# EAGLE board OLED_Block-GiantPanel-v10 (EAGLE 6.6.0), part 1 of 7
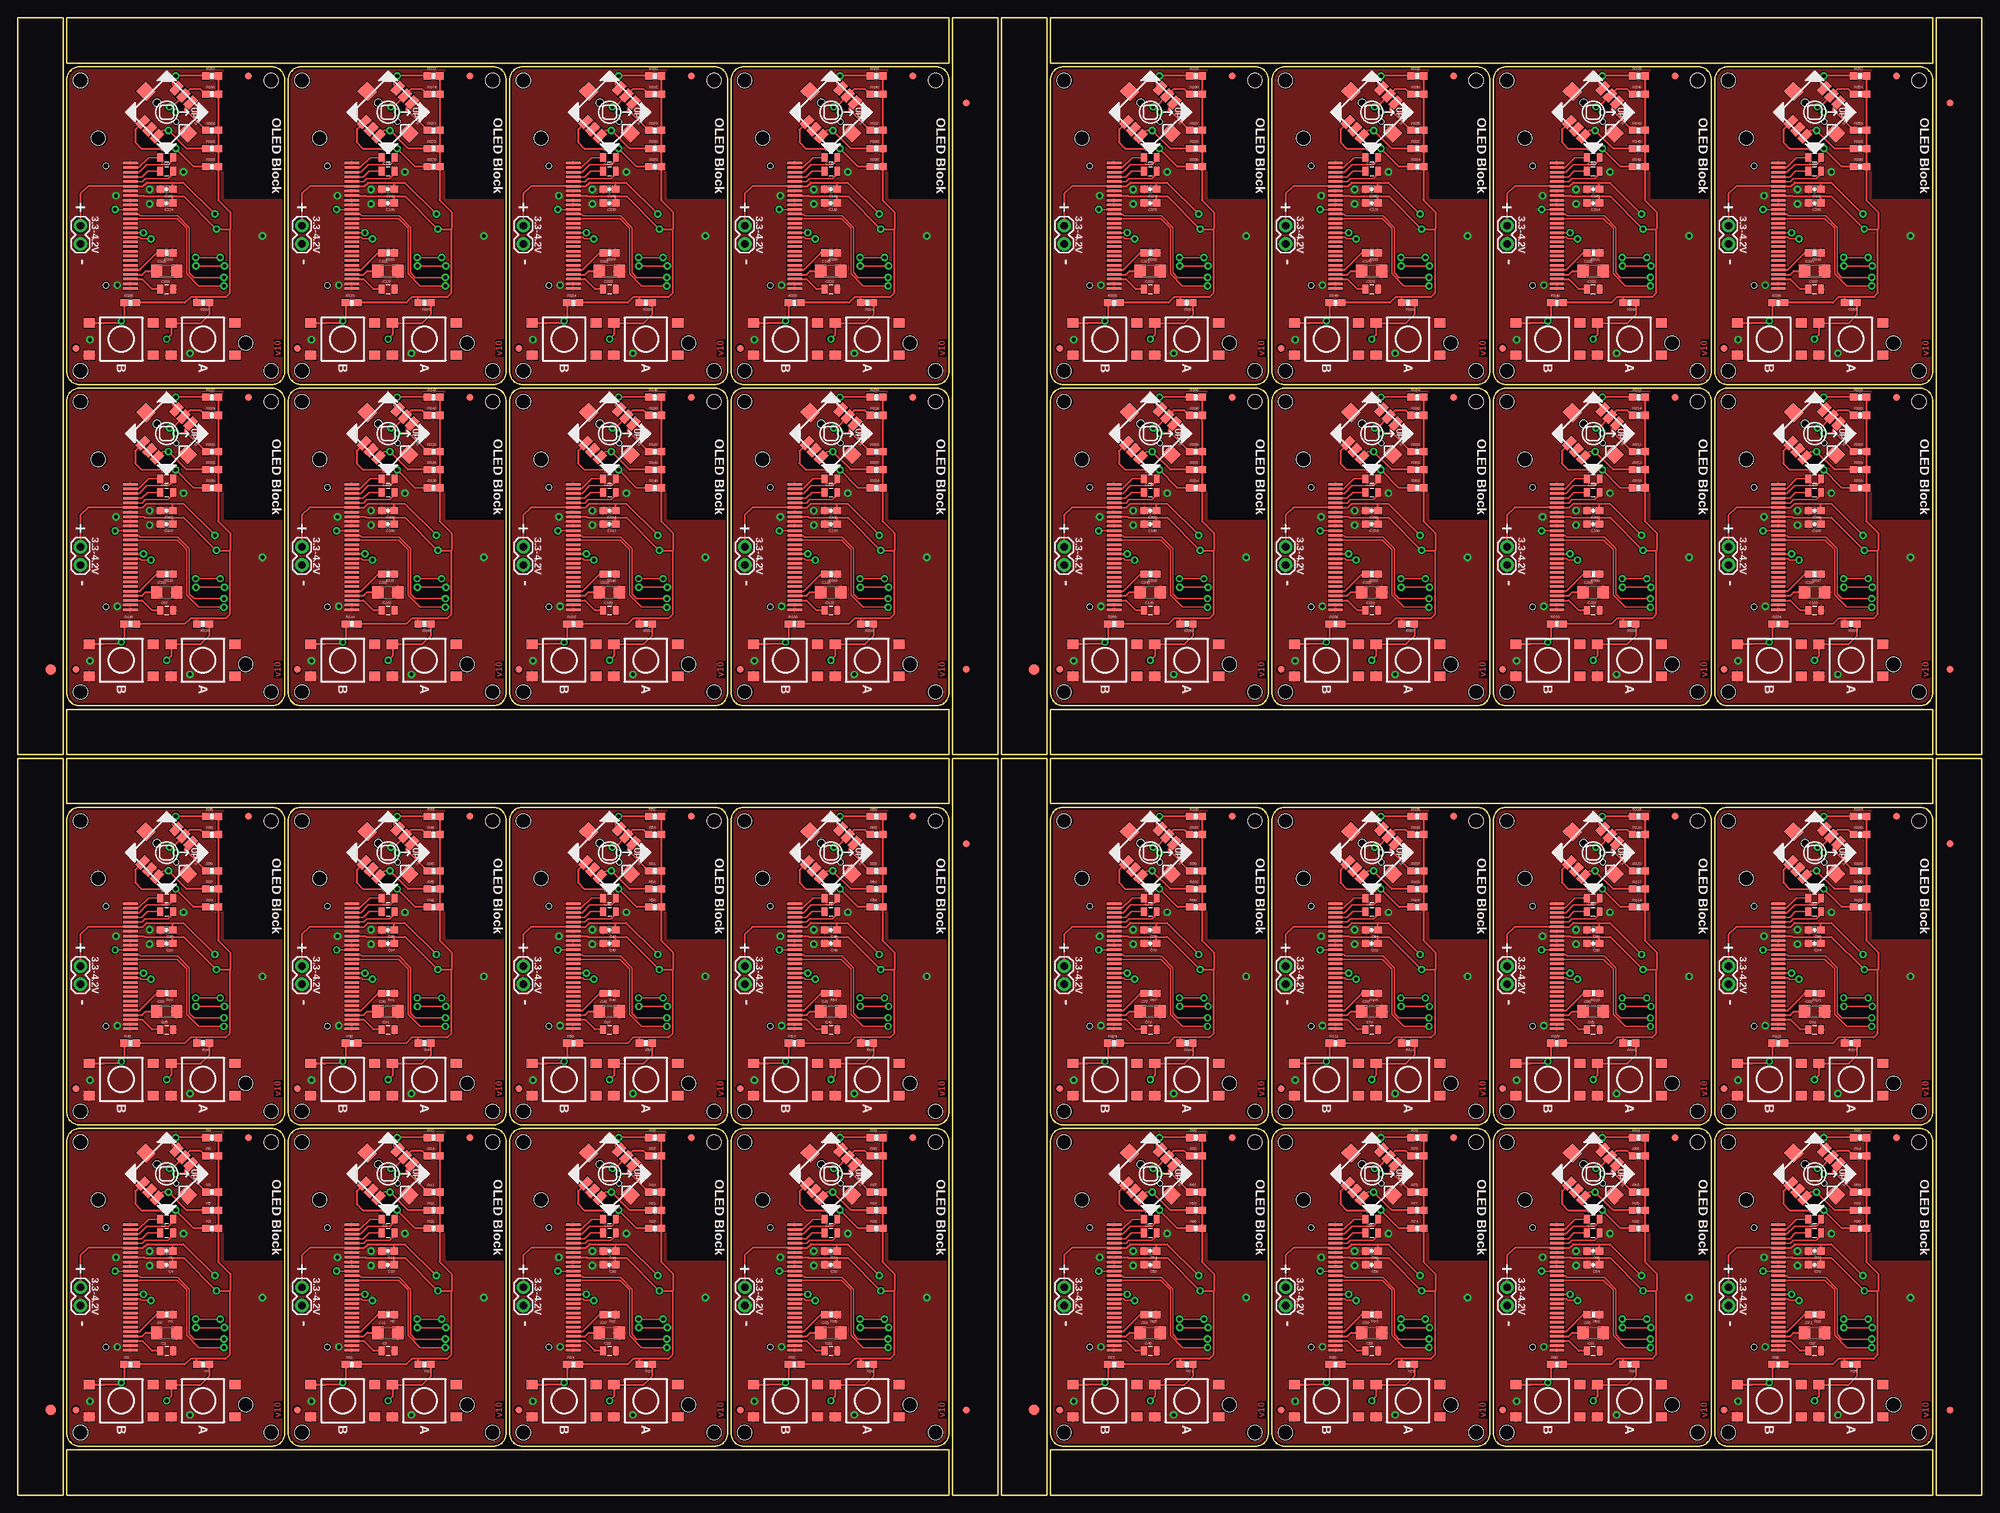
[diagram p0: board, top side]
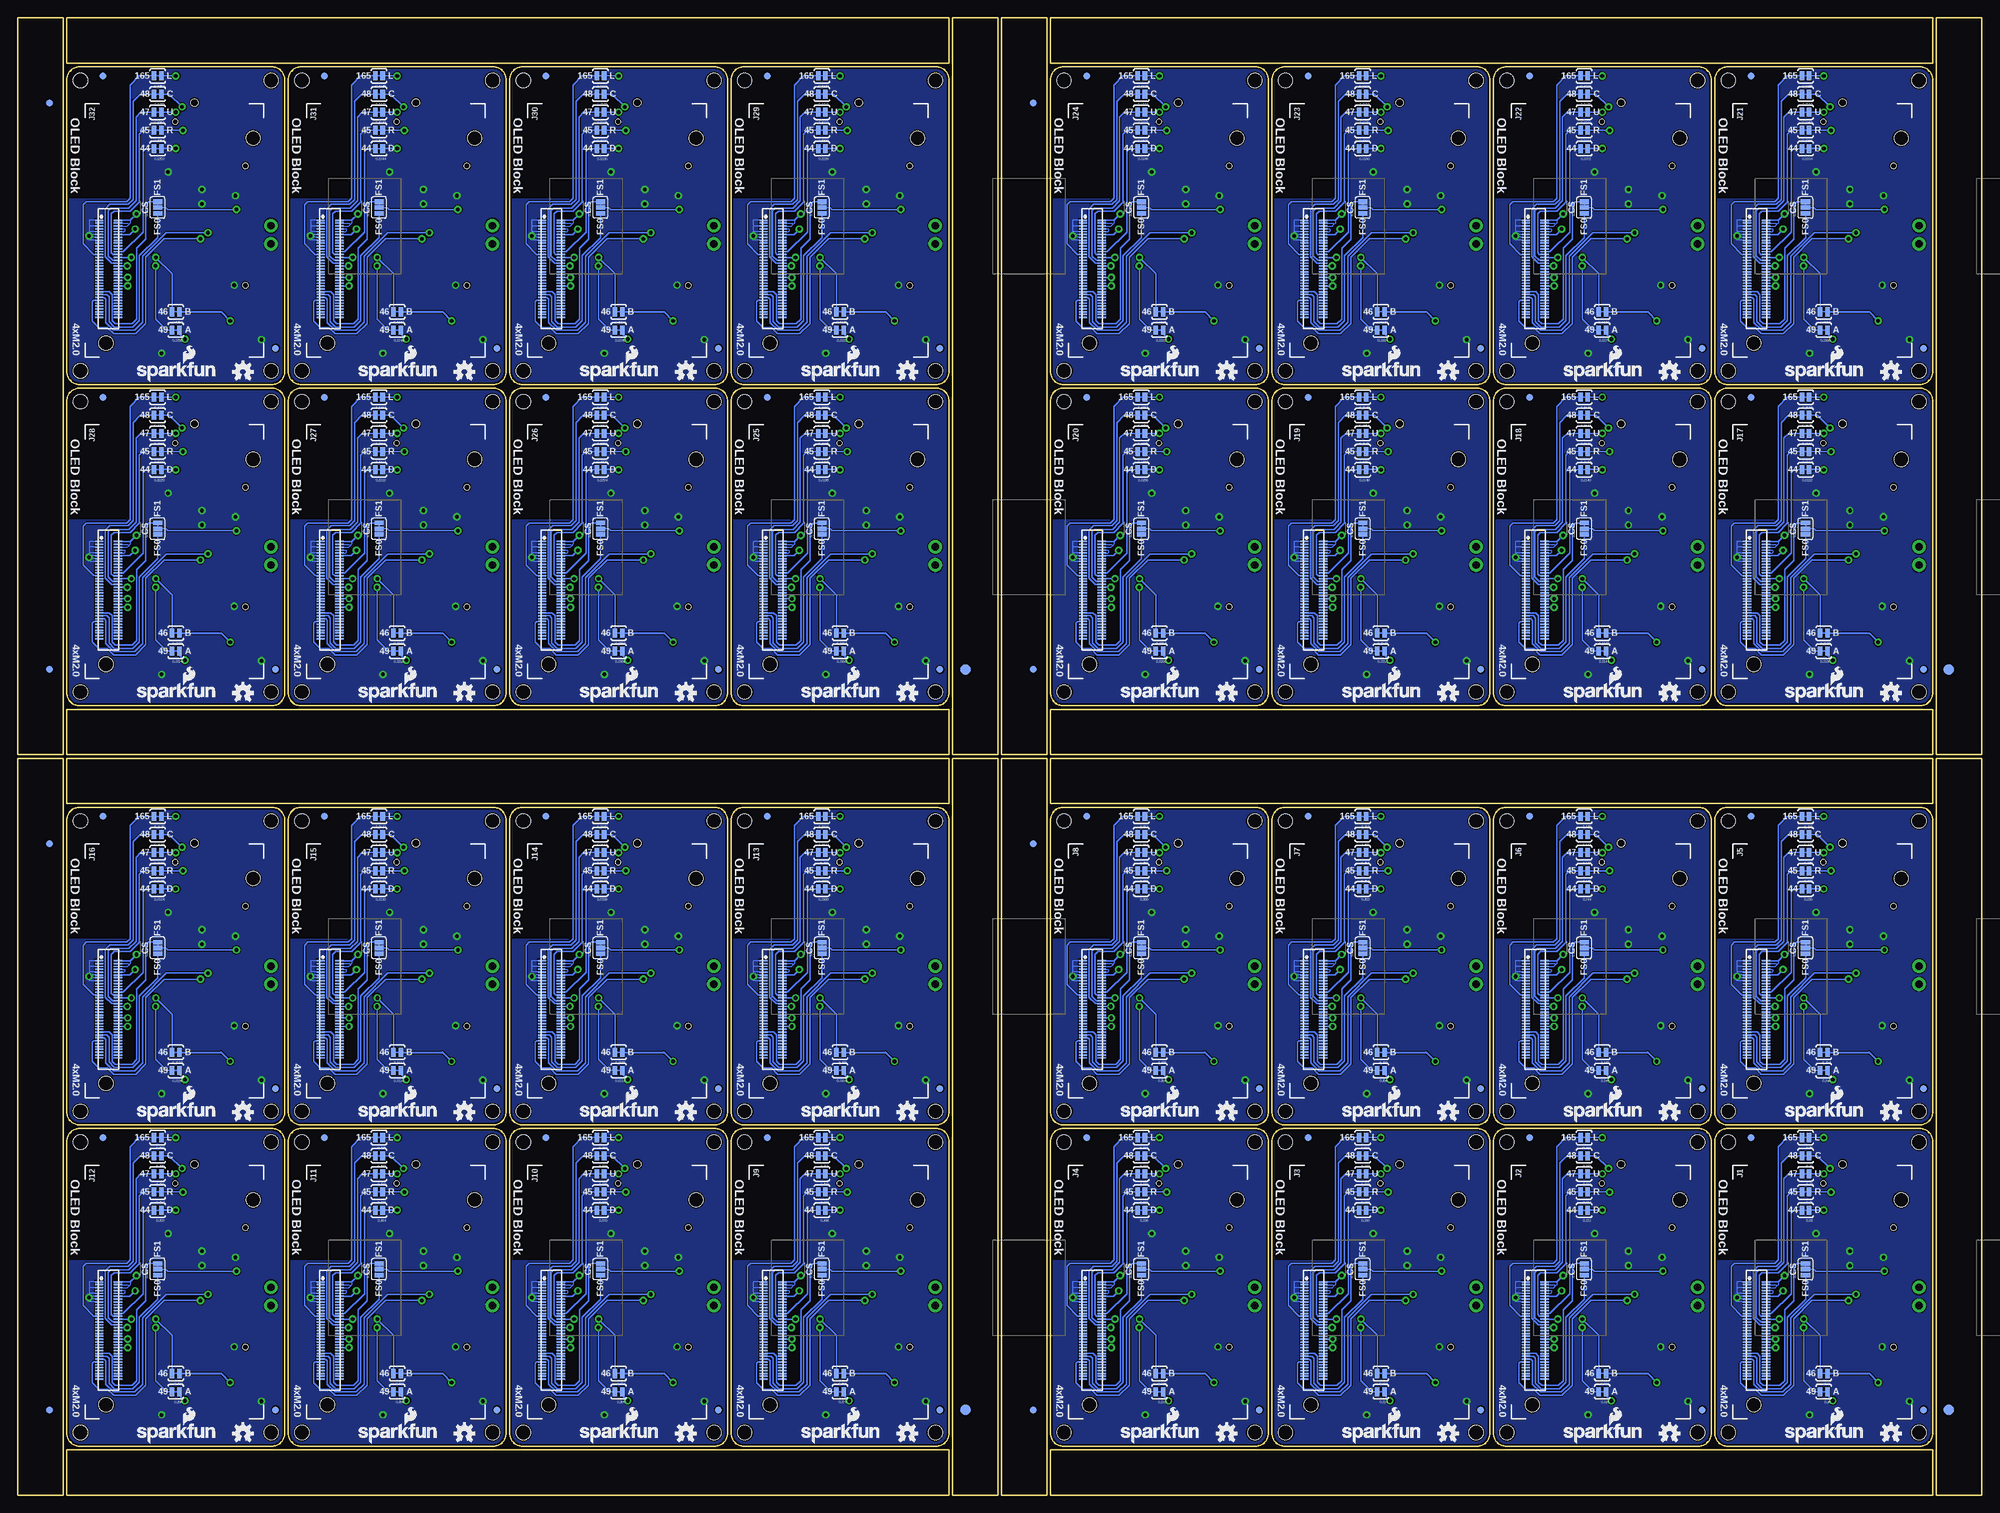
[diagram p1: board, bottom side, seen from below]

Size 274.83 x 206.76 mm. Coordinates in mm from the lower left corner, seen from the top.
Outline: 336 segments
Copper layers (1*16): Top 0.035mm / dielectric 1.5mm / Bottom 0.035mm
Design rules "SparkFun-2-layer *": minimum track width 6mil, minimum drill 13mil, track to track 6mil, track to pad 6mil, pad to pad 6mil, via to via 6mil, smd to smd 6mil, copper to edge 8mil, drill to drill 8mil, minimum pad ring 12mil, minimum via ring 10mil, stop-mask expansion 4mil, vias tented up to drill 20mil, thermal gap 6mil
Holes 2 mm at 35.43,8.76 8.76,8.76 8.76,49.4 35.43,49.4 66.42,8.76 39.75,8.76 39.75,49.4 66.42,49.4 97.41,8.76 70.74,8.76 70.74,49.4 97.41,49.4 128.4,8.76 101.73,8.76 101.73,49.4 128.4,49.4 35.43,53.72 8.76,53.72 8.76,94.36 35.43,94.36 66.42,53.72 39.75,53.72 39.75,94.36 66.42,94.36 97.41,53.72 70.74,53.72 70.74,94.36 97.41,94.36 128.4,53.72 101.73,53.72 101.73,94.36 128.4,94.36 173.1,8.76 146.43,8.76 146.43,49.4 173.1,49.4 204.09,8.76 177.42,8.76 177.42,49.4 204.09,49.4 235.08,8.76 208.41,8.76 208.41,49.4 235.08,49.4 266.06,8.76 239.4,8.76 239.4,49.4 266.06,49.4 173.1,53.72 146.43,53.72 146.43,94.36 173.1,94.36 204.09,53.72 177.42,53.72 177.42,94.36 204.09,94.36 235.08,53.72 208.41,53.72 208.41,94.36 235.08,94.36 266.06,53.72 239.4,53.72 239.4,94.36 266.06,94.36 35.43,112.39 8.76,112.39 8.76,153.03 35.43,153.03 66.42,112.39 39.75,112.39 39.75,153.03 66.42,153.03 97.41,112.39 70.74,112.39 70.74,153.03 97.41,153.03 128.4,112.39 101.73,112.39 101.73,153.03 128.4,153.03 35.43,157.35 8.76,157.35 8.76,197.99 35.43,197.99 66.42,157.35 39.75,157.35 39.75,197.99 66.42,197.99 97.41,157.35 70.74,157.35 70.74,197.99 97.41,197.99 128.4,157.35 101.73,157.35 101.73,197.99 128.4,197.99 173.1,112.39 146.43,112.39 146.43,153.03 173.1,153.03 204.09,112.39 177.42,112.39 177.42,153.03 204.09,153.03 235.08,112.39 208.41,112.39 208.41,153.03 235.08,153.03 266.06,112.39 239.4,112.39 239.4,153.03 266.06,153.03 173.1,157.35 146.43,157.35 146.43,197.99 173.1,197.99 204.09,157.35 177.42,157.35 177.42,197.99 204.09,197.99 235.08,157.35 208.41,157.35 208.41,197.99 235.08,197.99 266.06,157.35 239.4,157.35 239.4,197.99 266.06,197.99
tRestrict: area 29,33 to 37.3,51.3; area 59.9,33 to 68.3,51.3; area 90.9,33 to 99.3,51.3; area 121.9,33 to 130.3,51.3; area 29,78 to 37.3,96.3; area 59.9,78 to 68.3,96.3; area 90.9,78 to 99.3,96.3; area 121.9,78 to 130.3,96.3; area 166.6,33 to 175,51.3; area 197.6,33 to 206,51.3; area 228.6,33 to 237,51.3; area 259.6,33 to 268,51.3; 20 more areas
bRestrict: area 29,33 to 37.3,51.3; area 59.9,33 to 68.3,51.3; area 90.9,33 to 99.3,51.3; area 121.9,33 to 130.3,51.3; area 29,78 to 37.3,96.3; area 59.9,78 to 68.3,96.3; area 90.9,78 to 99.3,96.3; area 121.9,78 to 130.3,96.3; area 166.6,33 to 175,51.3; area 197.6,33 to 206,51.3; area 228.6,33 to 237,51.3; area 259.6,33 to 268,51.3; 20 more areas

## Footprints (pad centres in the part's own frame; a part is rotated, then mirrored left to right if it is on the bottom)
0805 = smd 0.8 x 1.2: 1 -0.9,0; 2 0.9,0
0603-CAP = smd 1.1 x 1: 1 -0.85,0; 2 0.85,0
1206 = smd 1.6 x 1.8: 1 -1.4,0; 2 1.4,0
FIDUCIAL-1.5X3 = smd 1.5 x 1.5: 1 0,0
FIDUCIAL-1X2 = smd 1 x 1: 1 0,0
EDISON_DAUGHTER = smd 1.14 x 0.2: 1 1.98,19.17; 2 4.62,19.17; 3 1.98,18.77; 4 4.62,18.77; 5 1.98,18.37; 6 4.62,18.37; 7 1.98,17.97; 8 4.62,17.97; 9 1.98,17.57; 10 4.62,17.57; 11 1.98,17.17; 12 4.62,17.17; 13 1.98,16.77; 14 4.62,16.77; 15 1.98,16.37; 16 4.62,16.37; 17 1.98,15.97; 18 4.62,15.97; 19 1.98,15.57; 20 4.62,15.57; 21 1.98,15.17; 22 4.62,15.17; 23 1.98,14.77; 24 4.62,14.77; 25 1.98,14.37; 26 4.62,14.37; 27 1.98,13.97; 28 4.62,13.97; 29 1.98,13.57; 30 4.62,13.57; 31 1.98,13.17; 32 4.62,13.17; 33 1.98,12.77; 34 4.62,12.77; 35 1.98,12.37; 36 4.62,12.37; 37 1.98,11.97; 38 4.62,11.97; 39 1.98,11.57; 40 4.62,11.57; 41 1.98,11.17; 42 4.62,11.17; 43 1.98,10.77; 44 4.62,10.77; 45 1.98,10.37; 46 4.62,10.37; 47 1.98,9.97; 48 4.62,9.97; 49 1.98,9.57; 50 4.62,9.57; 51 1.98,9.17; 52 4.62,9.17; 53 1.98,8.77; 54 4.62,8.77; 55 1.98,8.37; 56 4.62,8.37; 57 1.98,7.97; 58 4.62,7.97; 59 1.98,7.57; 60 4.62,7.57; 61 1.98,7.17; 62 4.62,7.17; 63 1.98,6.77; 64 4.62,6.77; 65 1.98,6.37; 66 4.62,6.37; 67 1.98,5.97; 68 4.62,5.97; 69 1.98,5.57; 70 4.62,5.57 | hole 2: 23.53,30.67; 2.93,1.98
1X02 = drill 1.016 pad 1.88: 1 0,0; 2 2.54,0
OLED-0.66-64X48 = smd 0.35 x 2: 1 0,0; 2 0.65,0; 3 1.3,0; 4 1.95,0; 5 2.6,0; 6 3.25,0; 7 3.9,0; 8 4.55,0; 9 5.2,0; 10 5.85,0; 11 6.5,0; 12 7.15,0; 13 7.8,0; 14 8.45,0; 15 9.1,0; 16 9.75,0; 17 10.4,0; 18 11.05,0; 19 11.7,0; 20 12.35,0; 21 13,0; 22 13.65,0; 23 14.3,0; 24 14.95,0; 25 15.6,0; 26 16.25,0; 27 16.9,0; 28 17.55,0 | hole 0.8: 17.15,-3.4; 0.4,-3.4
0603-RES = smd 1.1 x 1: 1 -0.85,0; 2 0.85,0
TACTILE_SWITCH_TALL = smd 1.55 x 1.3: A1 -4.475,-2.25; A2 4.475,-2.25; B1 -4.475,2.25; B2 4.475,2.25
JOYSTICK_MINI = smd 1.85 x 1.1: A -3.325,1.4; B 3.325,1.4; C -3.325,-1.4; CTR -3.325,0; D 3.325,-1.4; GND 3.325,0 | smd 1.9 x 2: NC 0,4.13; NC@0 0,-4.13 | hole 0.75: 0,1.9 | hole 1.05: 0,-1.9
PAD-JUMPER-2-NC_BY_TRACE_YES_SILK = smd 0.635 x 1.27: 1 -0.508,0; 2 0.508,0
PAD-JUMPER-3-2OF3_NC_BY_TRACE_YES_SILK_FULL_BOX = smd 0.635 x 1.27: 1 -0.813,0; 2 0,0; 3 0.813,0

## Placement (x,y rotation side)
C1  2.2uF  [0805]  20.83,20.19 0 top
C2  1uF X5R  [0805]  20.83,36.7 0 top
C3  1uF X5R  [0805]  20.83,38.61 0 top
C4  1uF  [0603-CAP]  20.83,32.26 180 top
C5  4.7uF/16V  [1206]  20.83,22.73 0 top
C6  1uF  [0603-CAP]  20.83,34.16 180 top
C7  2.2uF  [0805]  51.82,20.19 0 top
C8  1uF X5R  [0805]  51.82,36.7 0 top
C9  1uF X5R  [0805]  51.82,38.61 0 top
C10  1uF  [0603-CAP]  51.82,32.26 180 top
C11  4.7uF/16V  [1206]  51.82,22.73 0 top
C12  1uF  [0603-CAP]  51.82,34.16 180 top
C13  2.2uF  [0805]  82.8,20.19 0 top
C14  1uF X5R  [0805]  82.8,36.7 0 top
C15  1uF X5R  [0805]  82.8,38.61 0 top
C16  1uF  [0603-CAP]  82.8,32.26 180 top
C17  4.7uF/16V  [1206]  82.8,22.73 0 top
C18  1uF  [0603-CAP]  82.8,34.16 180 top
C19  2.2uF  [0805]  113.79,20.19 0 top
C20  1uF X5R  [0805]  113.79,36.7 0 top
C21  1uF X5R  [0805]  113.79,38.61 0 top
C22  1uF  [0603-CAP]  113.79,32.26 180 top
C23  4.7uF/16V  [1206]  113.79,22.73 0 top
C24  1uF  [0603-CAP]  113.79,34.16 180 top
C25  2.2uF  [0805]  20.83,65.15 0 top
C26  1uF X5R  [0805]  20.83,81.66 0 top
C27  1uF X5R  [0805]  20.83,83.57 0 top
C28  1uF  [0603-CAP]  20.83,77.22 180 top
C29  4.7uF/16V  [1206]  20.83,67.69 0 top
C30  1uF  [0603-CAP]  20.83,79.12 180 top
C31  2.2uF  [0805]  51.82,65.15 0 top
C32  1uF X5R  [0805]  51.82,81.66 0 top
C33  1uF X5R  [0805]  51.82,83.57 0 top
C34  1uF  [0603-CAP]  51.82,77.22 180 top
C35  4.7uF/16V  [1206]  51.82,67.69 0 top
C36  1uF  [0603-CAP]  51.82,79.12 180 top
C37  2.2uF  [0805]  82.8,65.15 0 top
C38  1uF X5R  [0805]  82.8,81.66 0 top
C39  1uF X5R  [0805]  82.8,83.57 0 top
C40  1uF  [0603-CAP]  82.8,77.22 180 top
C41  4.7uF/16V  [1206]  82.8,67.69 0 top
C42  1uF  [0603-CAP]  82.8,79.12 180 top
C43  2.2uF  [0805]  113.79,65.15 0 top
C44  1uF X5R  [0805]  113.79,81.66 0 top
C45  1uF X5R  [0805]  113.79,83.57 0 top
C46  1uF  [0603-CAP]  113.79,77.22 180 top
C47  4.7uF/16V  [1206]  113.79,67.69 0 top
C48  1uF  [0603-CAP]  113.79,79.12 180 top
C49  2.2uF  [0805]  158.5,20.19 0 top
C50  1uF X5R  [0805]  158.5,36.7 0 top
C51  1uF X5R  [0805]  158.5,38.61 0 top
C52  1uF  [0603-CAP]  158.5,32.26 180 top
C53  4.7uF/16V  [1206]  158.5,22.73 0 top
C54  1uF  [0603-CAP]  158.5,34.16 180 top
C55  2.2uF  [0805]  189.48,20.19 0 top
C56  1uF X5R  [0805]  189.48,36.7 0 top
C57  1uF X5R  [0805]  189.48,38.61 0 top
C58  1uF  [0603-CAP]  189.48,32.26 180 top
C59  4.7uF/16V  [1206]  189.48,22.73 0 top
C60  1uF  [0603-CAP]  189.48,34.16 180 top
C61  2.2uF  [0805]  220.47,20.19 0 top
C62  1uF X5R  [0805]  220.47,36.7 0 top
C63  1uF X5R  [0805]  220.47,38.61 0 top
C64  1uF  [0603-CAP]  220.47,32.26 180 top
C65  4.7uF/16V  [1206]  220.47,22.73 0 top
C66  1uF  [0603-CAP]  220.47,34.16 180 top
C67  2.2uF  [0805]  251.46,20.19 0 top
C68  1uF X5R  [0805]  251.46,36.7 0 top
C69  1uF X5R  [0805]  251.46,38.61 0 top
C70  1uF  [0603-CAP]  251.46,32.26 180 top
C71  4.7uF/16V  [1206]  251.46,22.73 0 top
C72  1uF  [0603-CAP]  251.46,34.16 180 top
C73  2.2uF  [0805]  158.5,65.15 0 top
C74  1uF X5R  [0805]  158.5,81.66 0 top
C75  1uF X5R  [0805]  158.5,83.57 0 top
C76  1uF  [0603-CAP]  158.5,77.22 180 top
C77  4.7uF/16V  [1206]  158.5,67.69 0 top
C78  1uF  [0603-CAP]  158.5,79.12 180 top
C79  2.2uF  [0805]  189.48,65.15 0 top
C80  1uF X5R  [0805]  189.48,81.66 0 top
C81  1uF X5R  [0805]  189.48,83.57 0 top
C82  1uF  [0603-CAP]  189.48,77.22 180 top
C83  4.7uF/16V  [1206]  189.48,67.69 0 top
C84  1uF  [0603-CAP]  189.48,79.12 180 top
C85  2.2uF  [0805]  220.47,65.15 0 top
C86  1uF X5R  [0805]  220.47,81.66 0 top
C87  1uF X5R  [0805]  220.47,83.57 0 top
C88  1uF  [0603-CAP]  220.47,77.22 180 top
C89  4.7uF/16V  [1206]  220.47,67.69 0 top
C90  1uF  [0603-CAP]  220.47,79.12 180 top
C91  2.2uF  [0805]  251.46,65.15 0 top
C92  1uF X5R  [0805]  251.46,81.66 0 top
C93  1uF X5R  [0805]  251.46,83.57 0 top
C94  1uF  [0603-CAP]  251.46,77.22 180 top
C95  4.7uF/16V  [1206]  251.46,67.69 0 top
C96  1uF  [0603-CAP]  251.46,79.12 180 top
C97  2.2uF  [0805]  20.83,123.83 0 top
C98  1uF X5R  [0805]  20.83,140.34 0 top
C99  1uF X5R  [0805]  20.83,142.24 0 top
C100  1uF  [0603-CAP]  20.83,135.89 180 top
C101  4.7uF/16V  [1206]  20.83,126.36 0 top
C102  1uF  [0603-CAP]  20.83,137.79 180 top
C103  2.2uF  [0805]  51.82,123.83 0 top
C104  1uF X5R  [0805]  51.82,140.34 0 top
C105  1uF X5R  [0805]  51.82,142.24 0 top
C106  1uF  [0603-CAP]  51.82,135.89 180 top
C107  4.7uF/16V  [1206]  51.82,126.36 0 top
C108  1uF  [0603-CAP]  51.82,137.79 180 top
C109  2.2uF  [0805]  82.8,123.83 0 top
C110  1uF X5R  [0805]  82.8,140.34 0 top
C111  1uF X5R  [0805]  82.8,142.24 0 top
C112  1uF  [0603-CAP]  82.8,135.89 180 top
C113  4.7uF/16V  [1206]  82.8,126.36 0 top
C114  1uF  [0603-CAP]  82.8,137.79 180 top
C115  2.2uF  [0805]  113.79,123.83 0 top
C116  1uF X5R  [0805]  113.79,140.34 0 top
C117  1uF X5R  [0805]  113.79,142.24 0 top
C118  1uF  [0603-CAP]  113.79,135.89 180 top
C119  4.7uF/16V  [1206]  113.79,126.36 0 top
C120  1uF  [0603-CAP]  113.79,137.79 180 top
C121  2.2uF  [0805]  20.83,168.78 0 top
C122  1uF X5R  [0805]  20.83,185.29 0 top
C123  1uF X5R  [0805]  20.83,187.2 0 top
C124  1uF  [0603-CAP]  20.83,180.85 180 top
C125  4.7uF/16V  [1206]  20.83,171.32 0 top
C126  1uF  [0603-CAP]  20.83,182.75 180 top
C127  2.2uF  [0805]  51.82,168.78 0 top
C128  1uF X5R  [0805]  51.82,185.29 0 top
C129  1uF X5R  [0805]  51.82,187.2 0 top
C130  1uF  [0603-CAP]  51.82,180.85 180 top
C131  4.7uF/16V  [1206]  51.82,171.32 0 top
C132  1uF  [0603-CAP]  51.82,182.75 180 top
C133  2.2uF  [0805]  82.8,168.78 0 top
C134  1uF X5R  [0805]  82.8,185.29 0 top
C135  1uF X5R  [0805]  82.8,187.2 0 top
C136  1uF  [0603-CAP]  82.8,180.85 180 top
C137  4.7uF/16V  [1206]  82.8,171.32 0 top
C138  1uF  [0603-CAP]  82.8,182.75 180 top
C139  2.2uF  [0805]  113.79,168.78 0 top
C140  1uF X5R  [0805]  113.79,185.29 0 top
C141  1uF X5R  [0805]  113.79,187.2 0 top
C142  1uF  [0603-CAP]  113.79,180.85 180 top
C143  4.7uF/16V  [1206]  113.79,171.32 0 top
C144  1uF  [0603-CAP]  113.79,182.75 180 top
C145  2.2uF  [0805]  158.5,123.83 0 top
C146  1uF X5R  [0805]  158.5,140.34 0 top
C147  1uF X5R  [0805]  158.5,142.24 0 top
C148  1uF  [0603-CAP]  158.5,135.89 180 top
C149  4.7uF/16V  [1206]  158.5,126.36 0 top
C150  1uF  [0603-CAP]  158.5,137.79 180 top
C151  2.2uF  [0805]  189.48,123.83 0 top
C152  1uF X5R  [0805]  189.48,140.34 0 top
C153  1uF X5R  [0805]  189.48,142.24 0 top
C154  1uF  [0603-CAP]  189.48,135.89 180 top
C155  4.7uF/16V  [1206]  189.48,126.36 0 top
C156  1uF  [0603-CAP]  189.48,137.79 180 top
C157  2.2uF  [0805]  220.47,123.83 0 top
C158  1uF X5R  [0805]  220.47,140.34 0 top
C159  1uF X5R  [0805]  220.47,142.24 0 top
C160  1uF  [0603-CAP]  220.47,135.89 180 top
C161  4.7uF/16V  [1206]  220.47,126.36 0 top
C162  1uF  [0603-CAP]  220.47,137.79 180 top
C163  2.2uF  [0805]  251.46,123.83 0 top
C164  1uF X5R  [0805]  251.46,140.34 0 top
C165  1uF X5R  [0805]  251.46,142.24 0 top
C166  1uF  [0603-CAP]  251.46,135.89 180 top
C167  4.7uF/16V  [1206]  251.46,126.36 0 top
C168  1uF  [0603-CAP]  251.46,137.79 180 top
C169  2.2uF  [0805]  158.5,168.78 0 top
C170  1uF X5R  [0805]  158.5,185.29 0 top
C171  1uF X5R  [0805]  158.5,187.2 0 top
C172  1uF  [0603-CAP]  158.5,180.85 180 top
C173  4.7uF/16V  [1206]  158.5,171.32 0 top
C174  1uF  [0603-CAP]  158.5,182.75 180 top
C175  2.2uF  [0805]  189.48,168.78 0 top
C176  1uF X5R  [0805]  189.48,185.29 0 top
C177  1uF X5R  [0805]  189.48,187.2 0 top
C178  1uF  [0603-CAP]  189.48,180.85 180 top
C179  4.7uF/16V  [1206]  189.48,171.32 0 top
C180  1uF  [0603-CAP]  189.48,182.75 180 top
C181  2.2uF  [0805]  220.47,168.78 0 top
C182  1uF X5R  [0805]  220.47,185.29 0 top
C183  1uF X5R  [0805]  220.47,187.2 0 top
C184  1uF  [0603-CAP]  220.47,180.85 180 top
C185  4.7uF/16V  [1206]  220.47,171.32 0 top
C186  1uF  [0603-CAP]  220.47,182.75 180 top
C187  2.2uF  [0805]  251.46,168.78 0 top
C188  1uF X5R  [0805]  251.46,185.29 0 top
C189  1uF X5R  [0805]  251.46,187.2 0 top
C190  1uF  [0603-CAP]  251.46,180.85 180 top
C191  4.7uF/16V  [1206]  251.46,171.32 0 top
C192  1uF  [0603-CAP]  251.46,182.75 180 top
E$1  [FIDUCIAL-1.5X3]  4.57,11.94 0 top
E$2  [FIDUCIAL-1.5X3]  4.57,11.94 0 bottom
E$3  [FIDUCIAL-1X2]  132.72,11.94 0 bottom
E$4  [FIDUCIAL-1X2]  132.72,11.94 0 top
E$5  [FIDUCIAL-1X2]  132.72,91.19 180 top
E$6  [FIDUCIAL-1X2]  132.72,91.19 180 bottom
E$7  [FIDUCIAL-1X2]  270.38,11.94 0 top
E$8  [FIDUCIAL-1X2]  270.38,91.19 180 top
E$9  [FIDUCIAL-1.5X3]  142.24,11.94 0 top
E$10  [FIDUCIAL-1.5X3]  142.24,11.94 0 bottom
E$11  [FIDUCIAL-1X2]  270.38,11.94 0 bottom
E$12  [FIDUCIAL-1X2]  270.38,91.19 180 bottom
E$13  [FIDUCIAL-1X2]  132.72,115.57 0 top
E$14  [FIDUCIAL-1X2]  132.72,194.82 180 top
E$15  [FIDUCIAL-1.5X3]  4.57,115.57 0 top
E$16  [FIDUCIAL-1.5X3]  4.57,115.57 0 bottom
E$17  [FIDUCIAL-1X2]  132.72,115.57 0 bottom
E$18  [FIDUCIAL-1X2]  132.72,194.82 180 bottom
E$19  [FIDUCIAL-1X2]  270.38,115.57 0 top
E$20  [FIDUCIAL-1X2]  270.38,194.82 180 top
E$21  [FIDUCIAL-1.5X3]  142.24,115.57 0 top
E$22  [FIDUCIAL-1.5X3]  142.24,115.57 0 bottom
E$23  [FIDUCIAL-1X2]  270.38,115.57 0 bottom
E$24  [FIDUCIAL-1X2]  270.38,194.82 180 bottom
FID1  FIDUCIAL1X2  [FIDUCIAL-1X2]  32.26,50.04 0 bottom
FID2  FIDUCIAL1X2  [FIDUCIAL-1X2]  8.13,11.94 0 top
FID3  FIDUCIAL1X2  [FIDUCIAL-1X2]  8.13,11.94 0 bottom
FID4  FIDUCIAL1X2  [FIDUCIAL-1X2]  32.26,50.04 0 top
FID5  FIDUCIAL1X2  [FIDUCIAL-1X2]  63.25,50.04 0 bottom
FID6  FIDUCIAL1X2  [FIDUCIAL-1X2]  39.12,11.94 0 top
FID7  FIDUCIAL1X2  [FIDUCIAL-1X2]  39.12,11.94 0 bottom
FID8  FIDUCIAL1X2  [FIDUCIAL-1X2]  63.25,50.04 0 top
FID9  FIDUCIAL1X2  [FIDUCIAL-1X2]  94.23,50.04 0 bottom
FID10  FIDUCIAL1X2  [FIDUCIAL-1X2]  70.1,11.94 0 top
FID11  FIDUCIAL1X2  [FIDUCIAL-1X2]  70.1,11.94 0 bottom
FID12  FIDUCIAL1X2  [FIDUCIAL-1X2]  94.23,50.04 0 top
FID13  FIDUCIAL1X2  [FIDUCIAL-1X2]  125.22,50.04 0 bottom
FID14  FIDUCIAL1X2  [FIDUCIAL-1X2]  101.09,11.94 0 top
FID15  FIDUCIAL1X2  [FIDUCIAL-1X2]  101.09,11.94 0 bottom
FID16  FIDUCIAL1X2  [FIDUCIAL-1X2]  125.22,50.04 0 top
FID17  FIDUCIAL1X2  [FIDUCIAL-1X2]  32.26,95 0 bottom
FID18  FIDUCIAL1X2  [FIDUCIAL-1X2]  8.13,56.9 0 top
FID19  FIDUCIAL1X2  [FIDUCIAL-1X2]  8.13,56.9 0 bottom
FID20  FIDUCIAL1X2  [FIDUCIAL-1X2]  32.26,95 0 top
FID21  FIDUCIAL1X2  [FIDUCIAL-1X2]  63.25,95 0 bottom
FID22  FIDUCIAL1X2  [FIDUCIAL-1X2]  39.12,56.9 0 top
FID23  FIDUCIAL1X2  [FIDUCIAL-1X2]  39.12,56.9 0 bottom
FID24  FIDUCIAL1X2  [FIDUCIAL-1X2]  63.25,95 0 top
FID25  FIDUCIAL1X2  [FIDUCIAL-1X2]  94.23,95 0 bottom
FID26  FIDUCIAL1X2  [FIDUCIAL-1X2]  70.1,56.9 0 top
FID27  FIDUCIAL1X2  [FIDUCIAL-1X2]  70.1,56.9 0 bottom
FID28  FIDUCIAL1X2  [FIDUCIAL-1X2]  94.23,95 0 top
FID29  FIDUCIAL1X2  [FIDUCIAL-1X2]  125.22,95 0 bottom
FID30  FIDUCIAL1X2  [FIDUCIAL-1X2]  101.09,56.9 0 top
FID31  FIDUCIAL1X2  [FIDUCIAL-1X2]  101.09,56.9 0 bottom
FID32  FIDUCIAL1X2  [FIDUCIAL-1X2]  125.22,95 0 top
FID33  FIDUCIAL1X2  [FIDUCIAL-1X2]  169.93,50.04 0 bottom
FID34  FIDUCIAL1X2  [FIDUCIAL-1X2]  145.8,11.94 0 top
FID35  FIDUCIAL1X2  [FIDUCIAL-1X2]  145.8,11.94 0 bottom
FID36  FIDUCIAL1X2  [FIDUCIAL-1X2]  169.93,50.04 0 top
FID37  FIDUCIAL1X2  [FIDUCIAL-1X2]  200.91,50.04 0 bottom
FID38  FIDUCIAL1X2  [FIDUCIAL-1X2]  176.78,11.94 0 top
FID39  FIDUCIAL1X2  [FIDUCIAL-1X2]  176.78,11.94 0 bottom
FID40  FIDUCIAL1X2  [FIDUCIAL-1X2]  200.91,50.04 0 top
FID41  FIDUCIAL1X2  [FIDUCIAL-1X2]  231.9,50.04 0 bottom
FID42  FIDUCIAL1X2  [FIDUCIAL-1X2]  207.77,11.94 0 top
FID43  FIDUCIAL1X2  [FIDUCIAL-1X2]  207.77,11.94 0 bottom
FID44  FIDUCIAL1X2  [FIDUCIAL-1X2]  231.9,50.04 0 top
FID45  FIDUCIAL1X2  [FIDUCIAL-1X2]  262.89,50.04 0 bottom
FID46  FIDUCIAL1X2  [FIDUCIAL-1X2]  238.76,11.94 0 top
FID47  FIDUCIAL1X2  [FIDUCIAL-1X2]  238.76,11.94 0 bottom
FID48  FIDUCIAL1X2  [FIDUCIAL-1X2]  262.89,50.04 0 top
FID49  FIDUCIAL1X2  [FIDUCIAL-1X2]  169.93,95 0 bottom
FID50  FIDUCIAL1X2  [FIDUCIAL-1X2]  145.8,56.9 0 top
FID51  FIDUCIAL1X2  [FIDUCIAL-1X2]  145.8,56.9 0 bottom
FID52  FIDUCIAL1X2  [FIDUCIAL-1X2]  169.93,95 0 top
FID53  FIDUCIAL1X2  [FIDUCIAL-1X2]  200.91,95 0 bottom
FID54  FIDUCIAL1X2  [FIDUCIAL-1X2]  176.78,56.9 0 top
FID55  FIDUCIAL1X2  [FIDUCIAL-1X2]  176.78,56.9 0 bottom
FID56  FIDUCIAL1X2  [FIDUCIAL-1X2]  200.91,95 0 top
FID57  FIDUCIAL1X2  [FIDUCIAL-1X2]  231.9,95 0 bottom
FID58  FIDUCIAL1X2  [FIDUCIAL-1X2]  207.77,56.9 0 top
FID59  FIDUCIAL1X2  [FIDUCIAL-1X2]  207.77,56.9 0 bottom
FID60  FIDUCIAL1X2  [FIDUCIAL-1X2]  231.9,95 0 top
FID61  FIDUCIAL1X2  [FIDUCIAL-1X2]  262.89,95 0 bottom
FID62  FIDUCIAL1X2  [FIDUCIAL-1X2]  238.76,56.9 0 top
FID63  FIDUCIAL1X2  [FIDUCIAL-1X2]  238.76,56.9 0 bottom
FID64  FIDUCIAL1X2  [FIDUCIAL-1X2]  262.89,95 0 top
FID65  FIDUCIAL1X2  [FIDUCIAL-1X2]  32.26,153.67 0 bottom
FID66  FIDUCIAL1X2  [FIDUCIAL-1X2]  8.13,115.57 0 top
FID67  FIDUCIAL1X2  [FIDUCIAL-1X2]  8.13,115.57 0 bottom
FID68  FIDUCIAL1X2  [FIDUCIAL-1X2]  32.26,153.67 0 top
FID69  FIDUCIAL1X2  [FIDUCIAL-1X2]  63.25,153.67 0 bottom
FID70  FIDUCIAL1X2  [FIDUCIAL-1X2]  39.12,115.57 0 top
FID71  FIDUCIAL1X2  [FIDUCIAL-1X2]  39.12,115.57 0 bottom
FID72  FIDUCIAL1X2  [FIDUCIAL-1X2]  63.25,153.67 0 top
FID73  FIDUCIAL1X2  [FIDUCIAL-1X2]  94.23,153.67 0 bottom
FID74  FIDUCIAL1X2  [FIDUCIAL-1X2]  70.1,115.57 0 top
FID75  FIDUCIAL1X2  [FIDUCIAL-1X2]  70.1,115.57 0 bottom
FID76  FIDUCIAL1X2  [FIDUCIAL-1X2]  94.23,153.67 0 top
FID77  FIDUCIAL1X2  [FIDUCIAL-1X2]  125.22,153.67 0 bottom
FID78  FIDUCIAL1X2  [FIDUCIAL-1X2]  101.09,115.57 0 top
FID79  FIDUCIAL1X2  [FIDUCIAL-1X2]  101.09,115.57 0 bottom
FID80  FIDUCIAL1X2  [FIDUCIAL-1X2]  125.22,153.67 0 top
FID81  FIDUCIAL1X2  [FIDUCIAL-1X2]  32.26,198.63 0 bottom
FID82  FIDUCIAL1X2  [FIDUCIAL-1X2]  8.13,160.53 0 top
FID83  FIDUCIAL1X2  [FIDUCIAL-1X2]  8.13,160.53 0 bottom
FID84  FIDUCIAL1X2  [FIDUCIAL-1X2]  32.26,198.63 0 top
FID85  FIDUCIAL1X2  [FIDUCIAL-1X2]  63.25,198.63 0 bottom
FID86  FIDUCIAL1X2  [FIDUCIAL-1X2]  39.12,160.53 0 top
FID87  FIDUCIAL1X2  [FIDUCIAL-1X2]  39.12,160.53 0 bottom
FID88  FIDUCIAL1X2  [FIDUCIAL-1X2]  63.25,198.63 0 top
FID89  FIDUCIAL1X2  [FIDUCIAL-1X2]  94.23,198.63 0 bottom
FID90  FIDUCIAL1X2  [FIDUCIAL-1X2]  70.1,160.53 0 top
FID91  FIDUCIAL1X2  [FIDUCIAL-1X2]  70.1,160.53 0 bottom
FID92  FIDUCIAL1X2  [FIDUCIAL-1X2]  94.23,198.63 0 top
FID93  FIDUCIAL1X2  [FIDUCIAL-1X2]  125.22,198.63 0 bottom
FID94  FIDUCIAL1X2  [FIDUCIAL-1X2]  101.09,160.53 0 top
FID95  FIDUCIAL1X2  [FIDUCIAL-1X2]  101.09,160.53 0 bottom
FID96  FIDUCIAL1X2  [FIDUCIAL-1X2]  125.22,198.63 0 top
FID97  FIDUCIAL1X2  [FIDUCIAL-1X2]  169.93,153.67 0 bottom
FID98  FIDUCIAL1X2  [FIDUCIAL-1X2]  145.8,115.57 0 top
FID99  FIDUCIAL1X2  [FIDUCIAL-1X2]  145.8,115.57 0 bottom
FID100  FIDUCIAL1X2  [FIDUCIAL-1X2]  169.93,153.67 0 top
FID101  FIDUCIAL1X2  [FIDUCIAL-1X2]  200.91,153.67 0 bottom
FID102  FIDUCIAL1X2  [FIDUCIAL-1X2]  176.78,115.57 0 top
FID103  FIDUCIAL1X2  [FIDUCIAL-1X2]  176.78,115.57 0 bottom
FID104  FIDUCIAL1X2  [FIDUCIAL-1X2]  200.91,153.67 0 top
FID105  FIDUCIAL1X2  [FIDUCIAL-1X2]  231.9,153.67 0 bottom
FID106  FIDUCIAL1X2  [FIDUCIAL-1X2]  207.77,115.57 0 top
FID107  FIDUCIAL1X2  [FIDUCIAL-1X2]  207.77,115.57 0 bottom
FID108  FIDUCIAL1X2  [FIDUCIAL-1X2]  231.9,153.67 0 top
FID109  FIDUCIAL1X2  [FIDUCIAL-1X2]  262.89,153.67 0 bottom
FID110  FIDUCIAL1X2  [FIDUCIAL-1X2]  238.76,115.57 0 top
FID111  FIDUCIAL1X2  [FIDUCIAL-1X2]  238.76,115.57 0 bottom
FID112  FIDUCIAL1X2  [FIDUCIAL-1X2]  262.89,153.67 0 top
FID113  FIDUCIAL1X2  [FIDUCIAL-1X2]  169.93,198.63 0 bottom
FID114  FIDUCIAL1X2  [FIDUCIAL-1X2]  145.8,160.53 0 top
FID115  FIDUCIAL1X2  [FIDUCIAL-1X2]  145.8,160.53 0 bottom
FID116  FIDUCIAL1X2  [FIDUCIAL-1X2]  169.93,198.63 0 top
FID117  FIDUCIAL1X2  [FIDUCIAL-1X2]  200.91,198.63 0 bottom
FID118  FIDUCIAL1X2  [FIDUCIAL-1X2]  176.78,160.53 0 top
FID119  FIDUCIAL1X2  [FIDUCIAL-1X2]  176.78,160.53 0 bottom
FID120  FIDUCIAL1X2  [FIDUCIAL-1X2]  200.91,198.63 0 top
FID121  FIDUCIAL1X2  [FIDUCIAL-1X2]  231.9,198.63 0 bottom
FID122  FIDUCIAL1X2  [FIDUCIAL-1X2]  207.77,160.53 0 top
FID123  FIDUCIAL1X2  [FIDUCIAL-1X2]  207.77,160.53 0 bottom
FID124  FIDUCIAL1X2  [FIDUCIAL-1X2]  231.9,198.63 0 top
FID125  FIDUCIAL1X2  [FIDUCIAL-1X2]  262.89,198.63 0 bottom
FID126  FIDUCIAL1X2  [FIDUCIAL-1X2]  238.76,160.53 0 top
FID127  FIDUCIAL1X2  [FIDUCIAL-1X2]  238.76,160.53 0 bottom
FID128  FIDUCIAL1X2  [FIDUCIAL-1X2]  262.89,198.63 0 top
J1  EDISON_CONNECTOR_FULLMOUNTING_HOLES  [EDISON_DAUGHTER]  34.8,10.67 0 bottom
J2  EDISON_CONNECTOR_FULLMOUNTING_HOLES  [EDISON_DAUGHTER]  65.79,10.67 0 bottom
J3  EDISON_CONNECTOR_FULLMOUNTING_HOLES  [EDISON_DAUGHTER]  96.77,10.67 0 bottom
J4  EDISON_CONNECTOR_FULLMOUNTING_HOLES  [EDISON_DAUGHTER]  127.76,10.67 0 bottom
J5  EDISON_CONNECTOR_FULLMOUNTING_HOLES  [EDISON_DAUGHTER]  34.8,55.63 0 bottom
J6  EDISON_CONNECTOR_FULLMOUNTING_HOLES  [EDISON_DAUGHTER]  65.79,55.63 0 bottom
J7  EDISON_CONNECTOR_FULLMOUNTING_HOLES  [EDISON_DAUGHTER]  96.77,55.63 0 bottom
J8  EDISON_CONNECTOR_FULLMOUNTING_HOLES  [EDISON_DAUGHTER]  127.76,55.63 0 bottom
J9  EDISON_CONNECTOR_FULLMOUNTING_HOLES  [EDISON_DAUGHTER]  172.47,10.67 0 bottom
J10  EDISON_CONNECTOR_FULLMOUNTING_HOLES  [EDISON_DAUGHTER]  203.45,10.67 0 bottom
J11  EDISON_CONNECTOR_FULLMOUNTING_HOLES  [EDISON_DAUGHTER]  234.44,10.67 0 bottom
J12  EDISON_CONNECTOR_FULLMOUNTING_HOLES  [EDISON_DAUGHTER]  265.43,10.67 0 bottom
J13  EDISON_CONNECTOR_FULLMOUNTING_HOLES  [EDISON_DAUGHTER]  172.47,55.63 0 bottom
J14  EDISON_CONNECTOR_FULLMOUNTING_HOLES  [EDISON_DAUGHTER]  203.45,55.63 0 bottom
J15  EDISON_CONNECTOR_FULLMOUNTING_HOLES  [EDISON_DAUGHTER]  234.44,55.63 0 bottom
J16  EDISON_CONNECTOR_FULLMOUNTING_HOLES  [EDISON_DAUGHTER]  265.43,55.63 0 bottom
J17  EDISON_CONNECTOR_FULLMOUNTING_HOLES  [EDISON_DAUGHTER]  34.8,114.3 0 bottom
J18  EDISON_CONNECTOR_FULLMOUNTING_HOLES  [EDISON_DAUGHTER]  65.79,114.3 0 bottom
J19  EDISON_CONNECTOR_FULLMOUNTING_HOLES  [EDISON_DAUGHTER]  96.77,114.3 0 bottom
J20  EDISON_CONNECTOR_FULLMOUNTING_HOLES  [EDISON_DAUGHTER]  127.76,114.3 0 bottom
J21  EDISON_CONNECTOR_FULLMOUNTING_HOLES  [EDISON_DAUGHTER]  34.8,159.26 0 bottom
J22  EDISON_CONNECTOR_FULLMOUNTING_HOLES  [EDISON_DAUGHTER]  65.79,159.26 0 bottom
J23  EDISON_CONNECTOR_FULLMOUNTING_HOLES  [EDISON_DAUGHTER]  96.77,159.26 0 bottom
J24  EDISON_CONNECTOR_FULLMOUNTING_HOLES  [EDISON_DAUGHTER]  127.76,159.26 0 bottom
J25  EDISON_CONNECTOR_FULLMOUNTING_HOLES  [EDISON_DAUGHTER]  172.47,114.3 0 bottom
J26  EDISON_CONNECTOR_FULLMOUNTING_HOLES  [EDISON_DAUGHTER]  203.45,114.3 0 bottom
J27  EDISON_CONNECTOR_FULLMOUNTING_HOLES  [EDISON_DAUGHTER]  234.44,114.3 0 bottom
J28  EDISON_CONNECTOR_FULLMOUNTING_HOLES  [EDISON_DAUGHTER]  265.43,114.3 0 bottom
J29  EDISON_CONNECTOR_FULLMOUNTING_HOLES  [EDISON_DAUGHTER]  172.47,159.26 0 bottom
J30  EDISON_CONNECTOR_FULLMOUNTING_HOLES  [EDISON_DAUGHTER]  203.45,159.26 0 bottom
J31  EDISON_CONNECTOR_FULLMOUNTING_HOLES  [EDISON_DAUGHTER]  234.44,159.26 0 bottom
J32  EDISON_CONNECTOR_FULLMOUNTING_HOLES  [EDISON_DAUGHTER]  265.43,159.26 0 bottom
JP1  M02PTH  [1X02]  8.76,26.54 90 top
JP2  M02PTH  [1X02]  39.75,26.54 90 top
JP3  M02PTH  [1X02]  70.74,26.54 90 top
JP4  M02PTH  [1X02]  101.73,26.54 90 top
JP5  M02PTH  [1X02]  8.76,71.5 90 top
JP6  M02PTH  [1X02]  39.75,71.5 90 top
JP7  M02PTH  [1X02]  70.74,71.5 90 top
JP8  M02PTH  [1X02]  101.73,71.5 90 top
JP9  M02PTH  [1X02]  146.43,26.54 90 top
JP10  M02PTH  [1X02]  177.42,26.54 90 top
JP11  M02PTH  [1X02]  208.41,26.54 90 top
JP12  M02PTH  [1X02]  239.4,26.54 90 top
JP13  M02PTH  [1X02]  146.43,71.5 90 top
JP14  M02PTH  [1X02]  177.42,71.5 90 top
JP15  M02PTH  [1X02]  208.41,71.5 90 top
JP16  M02PTH  [1X02]  239.4,71.5 90 top
JP17  M02PTH  [1X02]  8.76,130.18 90 top
JP18  M02PTH  [1X02]  39.75,130.18 90 top
JP19  M02PTH  [1X02]  70.74,130.18 90 top
JP20  M02PTH  [1X02]  101.73,130.18 90 top
JP21  M02PTH  [1X02]  8.76,175.13 90 top
JP22  M02PTH  [1X02]  39.75,175.13 90 top
JP23  M02PTH  [1X02]  70.74,175.13 90 top
JP24  M02PTH  [1X02]  101.73,175.13 90 top
JP25  M02PTH  [1X02]  146.43,130.18 90 top
JP26  M02PTH  [1X02]  177.42,130.18 90 top
JP27  M02PTH  [1X02]  208.41,130.18 90 top
JP28  M02PTH  [1X02]  239.4,130.18 90 top
JP29  M02PTH  [1X02]  146.43,175.13 90 top
JP30  M02PTH  [1X02]  177.42,175.13 90 top
JP31  M02PTH  [1X02]  208.41,175.13 90 top
JP32  M02PTH  [1X02]  239.4,175.13 90 top
LOGO1  OSHW-LOGOS  [OSHW-LOGO-S]  43.69,8.64 0 bottom
LOGO2  OSHW-LOGOS  [OSHW-LOGO-S]  12.7,8.64 0 bottom
LOGO3  SFE_LOGO_NAME_FLAME.1_INCH  [SFE_LOGO_NAME_FLAME_.1]  27.94,7.11 0 bottom
LOGO4  SFE_LOGO_NAME_FLAME.1_INCH  [SFE_LOGO_NAME_FLAME_.1]  58.93,7.11 0 bottom
LOGO5  OSHW-LOGOS  [OSHW-LOGO-S]  74.68,8.64 0 bottom
LOGO6  SFE_LOGO_NAME_FLAME.1_INCH  [SFE_LOGO_NAME_FLAME_.1]  89.92,7.11 0 bottom
LOGO7  OSHW-LOGOS  [OSHW-LOGO-S]  105.66,8.64 0 bottom
LOGO8  SFE_LOGO_NAME_FLAME.1_INCH  [SFE_LOGO_NAME_FLAME_.1]  120.9,7.11 0 bottom
LOGO9  OSHW-LOGOS  [OSHW-LOGO-S]  12.7,53.59 0 bottom
LOGO10  SFE_LOGO_NAME_FLAME.1_INCH  [SFE_LOGO_NAME_FLAME_.1]  27.94,52.07 0 bottom
LOGO11  OSHW-LOGOS  [OSHW-LOGO-S]  43.69,53.59 0 bottom
LOGO12  SFE_LOGO_NAME_FLAME.1_INCH  [SFE_LOGO_NAME_FLAME_.1]  58.93,52.07 0 bottom
LOGO13  OSHW-LOGOS  [OSHW-LOGO-S]  74.68,53.59 0 bottom
LOGO14  SFE_LOGO_NAME_FLAME.1_INCH  [SFE_LOGO_NAME_FLAME_.1]  89.92,52.07 0 bottom
LOGO15  OSHW-LOGOS  [OSHW-LOGO-S]  105.66,53.59 0 bottom
LOGO16  SFE_LOGO_NAME_FLAME.1_INCH  [SFE_LOGO_NAME_FLAME_.1]  120.9,52.07 0 bottom
LOGO17  OSHW-LOGOS  [OSHW-LOGO-S]  150.37,8.64 0 bottom
LOGO18  SFE_LOGO_NAME_FLAME.1_INCH  [SFE_LOGO_NAME_FLAME_.1]  165.61,7.11 0 bottom
LOGO19  OSHW-LOGOS  [OSHW-LOGO-S]  181.36,8.64 0 bottom
LOGO20  SFE_LOGO_NAME_FLAME.1_INCH  [SFE_LOGO_NAME_FLAME_.1]  196.6,7.11 0 bottom
LOGO21  OSHW-LOGOS  [OSHW-LOGO-S]  212.34,8.64 0 bottom
LOGO22  SFE_LOGO_NAME_FLAME.1_INCH  [SFE_LOGO_NAME_FLAME_.1]  227.58,7.11 0 bottom
LOGO23  OSHW-LOGOS  [OSHW-LOGO-S]  243.33,8.64 0 bottom
LOGO24  SFE_LOGO_NAME_FLAME.1_INCH  [SFE_LOGO_NAME_FLAME_.1]  258.57,7.11 0 bottom
LOGO25  OSHW-LOGOS  [OSHW-LOGO-S]  150.37,53.59 0 bottom
LOGO26  SFE_LOGO_NAME_FLAME.1_INCH  [SFE_LOGO_NAME_FLAME_.1]  165.61,52.07 0 bottom
LOGO27  OSHW-LOGOS  [OSHW-LOGO-S]  181.36,53.59 0 bottom
LOGO28  SFE_LOGO_NAME_FLAME.1_INCH  [SFE_LOGO_NAME_FLAME_.1]  196.6,52.07 0 bottom
LOGO29  OSHW-LOGOS  [OSHW-LOGO-S]  212.34,53.59 0 bottom
LOGO30  SFE_LOGO_NAME_FLAME.1_INCH  [SFE_LOGO_NAME_FLAME_.1]  227.58,52.07 0 bottom
LOGO31  OSHW-LOGOS  [OSHW-LOGO-S]  243.33,53.59 0 bottom
LOGO32  SFE_LOGO_NAME_FLAME.1_INCH  [SFE_LOGO_NAME_FLAME_.1]  258.57,52.07 0 bottom
LOGO33  OSHW-LOGOS  [OSHW-LOGO-S]  12.7,112.27 0 bottom
LOGO34  SFE_LOGO_NAME_FLAME.1_INCH  [SFE_LOGO_NAME_FLAME_.1]  27.94,110.74 0 bottom
LOGO35  OSHW-LOGOS  [OSHW-LOGO-S]  43.69,112.27 0 bottom
LOGO36  SFE_LOGO_NAME_FLAME.1_INCH  [SFE_LOGO_NAME_FLAME_.1]  58.93,110.74 0 bottom
LOGO37  OSHW-LOGOS  [OSHW-LOGO-S]  74.68,112.27 0 bottom
LOGO38  SFE_LOGO_NAME_FLAME.1_INCH  [SFE_LOGO_NAME_FLAME_.1]  89.92,110.74 0 bottom
LOGO39  OSHW-LOGOS  [OSHW-LOGO-S]  105.66,112.27 0 bottom
LOGO40  SFE_LOGO_NAME_FLAME.1_INCH  [SFE_LOGO_NAME_FLAME_.1]  120.9,110.74 0 bottom
LOGO41  OSHW-LOGOS  [OSHW-LOGO-S]  12.7,157.23 0 bottom
LOGO42  SFE_LOGO_NAME_FLAME.1_INCH  [SFE_LOGO_NAME_FLAME_.1]  27.94,155.7 0 bottom
LOGO43  OSHW-LOGOS  [OSHW-LOGO-S]  43.69,157.23 0 bottom
LOGO44  SFE_LOGO_NAME_FLAME.1_INCH  [SFE_LOGO_NAME_FLAME_.1]  58.93,155.7 0 bottom
LOGO45  OSHW-LOGOS  [OSHW-LOGO-S]  74.68,157.23 0 bottom
LOGO46  SFE_LOGO_NAME_FLAME.1_INCH  [SFE_LOGO_NAME_FLAME_.1]  89.92,155.7 0 bottom
LOGO47  OSHW-LOGOS  [OSHW-LOGO-S]  105.66,157.23 0 bottom
LOGO48  SFE_LOGO_NAME_FLAME.1_INCH  [SFE_LOGO_NAME_FLAME_.1]  120.9,155.7 0 bottom
LOGO49  OSHW-LOGOS  [OSHW-LOGO-S]  150.37,112.27 0 bottom
LOGO50  SFE_LOGO_NAME_FLAME.1_INCH  [SFE_LOGO_NAME_FLAME_.1]  165.61,110.74 0 bottom
LOGO51  OSHW-LOGOS  [OSHW-LOGO-S]  181.36,112.27 0 bottom
LOGO52  SFE_LOGO_NAME_FLAME.1_INCH  [SFE_LOGO_NAME_FLAME_.1]  196.6,110.74 0 bottom
LOGO53  OSHW-LOGOS  [OSHW-LOGO-S]  212.34,112.27 0 bottom
LOGO54  SFE_LOGO_NAME_FLAME.1_INCH  [SFE_LOGO_NAME_FLAME_.1]  227.58,110.74 0 bottom
LOGO55  OSHW-LOGOS  [OSHW-LOGO-S]  243.33,112.27 0 bottom
LOGO56  SFE_LOGO_NAME_FLAME.1_INCH  [SFE_LOGO_NAME_FLAME_.1]  258.57,110.74 0 bottom
LOGO57  OSHW-LOGOS  [OSHW-LOGO-S]  150.37,157.23 0 bottom
LOGO58  SFE_LOGO_NAME_FLAME.1_INCH  [SFE_LOGO_NAME_FLAME_.1]  165.61,155.7 0 bottom
LOGO59  OSHW-LOGOS  [OSHW-LOGO-S]  181.36,157.23 0 bottom
LOGO60  SFE_LOGO_NAME_FLAME.1_INCH  [SFE_LOGO_NAME_FLAME_.1]  196.6,155.7 0 bottom
LOGO61  OSHW-LOGOS  [OSHW-LOGO-S]  212.34,157.23 0 bottom
LOGO62  SFE_LOGO_NAME_FLAME.1_INCH  [SFE_LOGO_NAME_FLAME_.1]  227.58,155.7 0 bottom
LOGO63  OSHW-LOGOS  [OSHW-LOGO-S]  243.33,157.23 0 bottom
LOGO64  SFE_LOGO_NAME_FLAME.1_INCH  [SFE_LOGO_NAME_FLAME_.1]  258.57,155.7 0 bottom
OLED1  OLED0.66  [OLED-0.66-64X48]  15.75,37.85 270 top
OLED2  OLED0.66  [OLED-0.66-64X48]  46.74,37.85 270 top
OLED3  OLED0.66  [OLED-0.66-64X48]  77.72,37.85 270 top
OLED4  OLED0.66  [OLED-0.66-64X48]  108.71,37.85 270 top
OLED5  OLED0.66  [OLED-0.66-64X48]  15.75,82.8 270 top
OLED6  OLED0.66  [OLED-0.66-64X48]  46.74,82.8 270 top
OLED7  OLED0.66  [OLED-0.66-64X48]  77.72,82.8 270 top
OLED8  OLED0.66  [OLED-0.66-64X48]  108.71,82.8 270 top
OLED9  OLED0.66  [OLED-0.66-64X48]  153.42,37.85 270 top
OLED10  OLED0.66  [OLED-0.66-64X48]  184.4,37.85 270 top
OLED11  OLED0.66  [OLED-0.66-64X48]  215.39,37.85 270 top
OLED12  OLED0.66  [OLED-0.66-64X48]  246.38,37.85 270 top
OLED13  OLED0.66  [OLED-0.66-64X48]  153.42,82.8 270 top
OLED14  OLED0.66  [OLED-0.66-64X48]  184.4,82.8 270 top
OLED15  OLED0.66  [OLED-0.66-64X48]  215.39,82.8 270 top
OLED16  OLED0.66  [OLED-0.66-64X48]  246.38,82.8 270 top
OLED17  OLED0.66  [OLED-0.66-64X48]  15.75,141.48 270 top
OLED18  OLED0.66  [OLED-0.66-64X48]  46.74,141.48 270 top
OLED19  OLED0.66  [OLED-0.66-64X48]  77.72,141.48 270 top
OLED20  OLED0.66  [OLED-0.66-64X48]  108.71,141.48 270 top
OLED21  OLED0.66  [OLED-0.66-64X48]  15.75,186.44 270 top
OLED22  OLED0.66  [OLED-0.66-64X48]  46.74,186.44 270 top
OLED23  OLED0.66  [OLED-0.66-64X48]  77.72,186.44 270 top
OLED24  OLED0.66  [OLED-0.66-64X48]  108.71,186.44 270 top
OLED25  OLED0.66  [OLED-0.66-64X48]  153.42,141.48 270 top
OLED26  OLED0.66  [OLED-0.66-64X48]  184.4,141.48 270 top
OLED27  OLED0.66  [OLED-0.66-64X48]  215.39,141.48 270 top
OLED28  OLED0.66  [OLED-0.66-64X48]  246.38,141.48 270 top
OLED29  OLED0.66  [OLED-0.66-64X48]  153.42,186.44 270 top
OLED30  OLED0.66  [OLED-0.66-64X48]  184.4,186.44 270 top
OLED31  OLED0.66  [OLED-0.66-64X48]  215.39,186.44 270 top
OLED32  OLED0.66  [OLED-0.66-64X48]  246.38,186.44 270 top
R1  390k  [0603-RES]  20.83,25.27 180 top
R2  10K  [0603-RES]  27.18,42.42 0 top
R3  10K  [0603-RES]  27.18,37.34 0 top
R4  10K  [0603-RES]  27.18,50.04 0 top
R5  10K  [0603-RES]  27.18,39.88 0 top
R6  10K  [0603-RES]  27.18,47.5 0 top
R7  10K  [0603-RES]  25.91,18.29 180 top
R8  10K  [0603-RES]  15.75,18.29 0 top
R9  390k  [0603-RES]  51.82,25.27 180 top
R10  10K  [0603-RES]  58.17,37.34 0 top
R11  10K  [0603-RES]  58.17,42.42 0 top
R12  10K  [0603-RES]  58.17,50.04 0 top
R13  10K  [0603-RES]  58.17,39.88 0 top
R14  10K  [0603-RES]  58.17,47.5 0 top
R15  10K  [0603-RES]  56.9,18.29 180 top
R16  10K  [0603-RES]  46.74,18.29 0 top
R17  390k  [0603-RES]  82.8,25.27 180 top
R18  10K  [0603-RES]  89.15,37.34 0 top
R19  10K  [0603-RES]  89.15,42.42 0 top
R20  10K  [0603-RES]  89.15,50.04 0 top
R21  10K  [0603-RES]  89.15,39.88 0 top
R22  10K  [0603-RES]  89.15,47.5 0 top
R23  10K  [0603-RES]  87.88,18.29 180 top
R24  10K  [0603-RES]  77.72,18.29 0 top
R25  390k  [0603-RES]  113.79,25.27 180 top
R26  10K  [0603-RES]  120.14,37.34 0 top
R27  10K  [0603-RES]  120.14,42.42 0 top
R28  10K  [0603-RES]  120.14,50.04 0 top
R29  10K  [0603-RES]  120.14,39.88 0 top
R30  10K  [0603-RES]  120.14,47.5 0 top
R31  10K  [0603-RES]  118.87,18.29 180 top
R32  10K  [0603-RES]  108.71,18.29 0 top
R33  390k  [0603-RES]  20.83,70.23 180 top
R34  10K  [0603-RES]  27.18,82.3 0 top
R35  10K  [0603-RES]  27.18,87.38 0 top
R36  10K  [0603-RES]  27.18,95 0 top
R37  10K  [0603-RES]  27.18,84.84 0 top
R38  10K  [0603-RES]  27.18,92.46 0 top
R39  10K  [0603-RES]  25.91,63.25 180 top
R40  10K  [0603-RES]  15.75,63.25 0 top
R41  390k  [0603-RES]  51.82,70.23 180 top
R42  10K  [0603-RES]  58.17,82.3 0 top
R43  10K  [0603-RES]  58.17,87.38 0 top
R44  10K  [0603-RES]  58.17,95 0 top
R45  10K  [0603-RES]  58.17,84.84 0 top
R46  10K  [0603-RES]  58.17,92.46 0 top
R47  10K  [0603-RES]  56.9,63.25 180 top
R48  10K  [0603-RES]  46.74,63.25 0 top
R49  390k  [0603-RES]  82.8,70.23 180 top
R50  10K  [0603-RES]  89.15,82.3 0 top
R51  10K  [0603-RES]  89.15,87.38 0 top
R52  10K  [0603-RES]  89.15,95 0 top
R53  10K  [0603-RES]  89.15,84.84 0 top
R54  10K  [0603-RES]  89.15,92.46 0 top
R55  10K  [0603-RES]  87.88,63.25 180 top
R56  10K  [0603-RES]  77.72,63.25 0 top
R57  390k  [0603-RES]  113.79,70.23 180 top
R58  10K  [0603-RES]  120.14,82.3 0 top
R59  10K  [0603-RES]  120.14,87.38 0 top
R60  10K  [0603-RES]  120.14,95 0 top
R61  10K  [0603-RES]  120.14,84.84 0 top
R62  10K  [0603-RES]  120.14,92.46 0 top
R63  10K  [0603-RES]  118.87,63.25 180 top
R64  10K  [0603-RES]  108.71,63.25 0 top
R65  390k  [0603-RES]  158.5,25.27 180 top
R66  10K  [0603-RES]  164.85,37.34 0 top
R67  10K  [0603-RES]  164.85,42.42 0 top
R68  10K  [0603-RES]  164.85,50.04 0 top
R69  10K  [0603-RES]  164.85,39.88 0 top
R70  10K  [0603-RES]  164.85,47.5 0 top
R71  10K  [0603-RES]  163.58,18.29 180 top
R72  10K  [0603-RES]  153.42,18.29 0 top
R73  390k  [0603-RES]  189.48,25.27 180 top
R74  10K  [0603-RES]  195.83,37.34 0 top
R75  10K  [0603-RES]  195.83,42.42 0 top
R76  10K  [0603-RES]  195.83,50.04 0 top
R77  10K  [0603-RES]  195.83,39.88 0 top
R78  10K  [0603-RES]  195.83,47.5 0 top
R79  10K  [0603-RES]  194.56,18.29 180 top
R80  10K  [0603-RES]  184.4,18.29 0 top
R81  390k  [0603-RES]  220.47,25.27 180 top
R82  10K  [0603-RES]  226.82,37.34 0 top
R83  10K  [0603-RES]  226.82,42.42 0 top
R84  10K  [0603-RES]  226.82,50.04 0 top
R85  10K  [0603-RES]  226.82,39.88 0 top
R86  10K  [0603-RES]  226.82,47.5 0 top
R87  10K  [0603-RES]  225.55,18.29 180 top
R88  10K  [0603-RES]  215.39,18.29 0 top
R89  390k  [0603-RES]  251.46,25.27 180 top
R90  10K  [0603-RES]  257.81,37.34 0 top
R91  10K  [0603-RES]  257.81,42.42 0 top
R92  10K  [0603-RES]  257.81,50.04 0 top
R93  10K  [0603-RES]  257.81,39.88 0 top
R94  10K  [0603-RES]  257.81,47.5 0 top
R95  10K  [0603-RES]  256.54,18.29 180 top
R96  10K  [0603-RES]  246.38,18.29 0 top
R97  390k  [0603-RES]  158.5,70.23 180 top
R98  10K  [0603-RES]  164.85,82.3 0 top
R99  10K  [0603-RES]  164.85,87.38 0 top
R100  10K  [0603-RES]  164.85,95 0 top
R101  10K  [0603-RES]  164.85,84.84 0 top
R102  10K  [0603-RES]  164.85,92.46 0 top
R103  10K  [0603-RES]  163.58,63.25 180 top
R104  10K  [0603-RES]  153.42,63.25 0 top
R105  390k  [0603-RES]  189.48,70.23 180 top
R106  10K  [0603-RES]  195.83,82.3 0 top
R107  10K  [0603-RES]  195.83,87.38 0 top
R108  10K  [0603-RES]  195.83,95 0 top
R109  10K  [0603-RES]  195.83,84.84 0 top
R110  10K  [0603-RES]  195.83,92.46 0 top
R111  10K  [0603-RES]  194.56,63.25 180 top
R112  10K  [0603-RES]  184.4,63.25 0 top
R113  390k  [0603-RES]  220.47,70.23 180 top
R114  10K  [0603-RES]  226.82,82.3 0 top
R115  10K  [0603-RES]  226.82,87.38 0 top
R116  10K  [0603-RES]  226.82,95 0 top
R117  10K  [0603-RES]  226.82,84.84 0 top
R118  10K  [0603-RES]  226.82,92.46 0 top
R119  10K  [0603-RES]  225.55,63.25 180 top
R120  10K  [0603-RES]  215.39,63.25 0 top
R121  390k  [0603-RES]  251.46,70.23 180 top
R122  10K  [0603-RES]  257.81,82.3 0 top
R123  10K  [0603-RES]  257.81,87.38 0 top
R124  10K  [0603-RES]  257.81,95 0 top
R125  10K  [0603-RES]  257.81,84.84 0 top
R126  10K  [0603-RES]  257.81,92.46 0 top
R127  10K  [0603-RES]  256.54,63.25 180 top
R128  10K  [0603-RES]  246.38,63.25 0 top
R129  390k  [0603-RES]  20.83,128.91 180 top
R130  10K  [0603-RES]  27.18,140.97 0 top
R131  10K  [0603-RES]  27.18,146.05 0 top
R132  10K  [0603-RES]  27.18,153.67 0 top
R133  10K  [0603-RES]  27.18,143.51 0 top
R134  10K  [0603-RES]  27.18,151.13 0 top
R135  10K  [0603-RES]  25.91,121.92 180 top
R136  10K  [0603-RES]  15.75,121.92 0 top
R137  390k  [0603-RES]  51.82,128.91 180 top
R138  10K  [0603-RES]  58.17,140.97 0 top
R139  10K  [0603-RES]  58.17,146.05 0 top
R140  10K  [0603-RES]  58.17,153.67 0 top
R141  10K  [0603-RES]  58.17,143.51 0 top
R142  10K  [0603-RES]  58.17,151.13 0 top
R143  10K  [0603-RES]  56.9,121.92 180 top
R144  10K  [0603-RES]  46.74,121.92 0 top
R145  390k  [0603-RES]  82.8,128.91 180 top
R146  10K  [0603-RES]  89.15,140.97 0 top
R147  10K  [0603-RES]  89.15,146.05 0 top
R148  10K  [0603-RES]  89.15,153.67 0 top
R149  10K  [0603-RES]  89.15,143.51 0 top
R150  10K  [0603-RES]  89.15,151.13 0 top
R151  10K  [0603-RES]  87.88,121.92 180 top
R152  10K  [0603-RES]  77.72,121.92 0 top
R153  390k  [0603-RES]  113.79,128.91 180 top
R154  10K  [0603-RES]  120.14,140.97 0 top
R155  10K  [0603-RES]  120.14,146.05 0 top
R156  10K  [0603-RES]  120.14,153.67 0 top
R157  10K  [0603-RES]  120.14,143.51 0 top
R158  10K  [0603-RES]  120.14,151.13 0 top
R159  10K  [0603-RES]  118.87,121.92 180 top
R160  10K  [0603-RES]  108.71,121.92 0 top
R161  390k  [0603-RES]  20.83,173.86 180 top
R162  10K  [0603-RES]  27.18,185.93 0 top
R163  10K  [0603-RES]  27.18,191.01 0 top
R164  10K  [0603-RES]  27.18,198.63 0 top
R165  10K  [0603-RES]  27.18,188.47 0 top
R166  10K  [0603-RES]  27.18,196.09 0 top
R167  10K  [0603-RES]  25.91,166.88 180 top
R168  10K  [0603-RES]  15.75,166.88 0 top
R169  390k  [0603-RES]  51.82,173.86 180 top
R170  10K  [0603-RES]  58.17,185.93 0 top
R171  10K  [0603-RES]  58.17,191.01 0 top
R172  10K  [0603-RES]  58.17,198.63 0 top
R173  10K  [0603-RES]  58.17,188.47 0 top
R174  10K  [0603-RES]  58.17,196.09 0 top
R175  10K  [0603-RES]  56.9,166.88 180 top
R176  10K  [0603-RES]  46.74,166.88 0 top
R177  390k  [0603-RES]  82.8,173.86 180 top
R178  10K  [0603-RES]  89.15,185.93 0 top
R179  10K  [0603-RES]  89.15,191.01 0 top
R180  10K  [0603-RES]  89.15,198.63 0 top
R181  10K  [0603-RES]  89.15,188.47 0 top
R182  10K  [0603-RES]  89.15,196.09 0 top
R183  10K  [0603-RES]  87.88,166.88 180 top
R184  10K  [0603-RES]  77.72,166.88 0 top
R185  390k  [0603-RES]  113.79,173.86 180 top
R186  10K  [0603-RES]  120.14,185.93 0 top
R187  10K  [0603-RES]  120.14,191.01 0 top
R188  10K  [0603-RES]  120.14,198.63 0 top
R189  10K  [0603-RES]  120.14,188.47 0 top
R190  10K  [0603-RES]  120.14,196.09 0 top
R191  10K  [0603-RES]  118.87,166.88 180 top
R192  10K  [0603-RES]  108.71,166.88 0 top
R193  390k  [0603-RES]  158.5,128.91 180 top
R194  10K  [0603-RES]  164.85,140.97 0 top
R195  10K  [0603-RES]  164.85,146.05 0 top
R196  10K  [0603-RES]  164.85,153.67 0 top
R197  10K  [0603-RES]  164.85,143.51 0 top
R198  10K  [0603-RES]  164.85,151.13 0 top
R199  10K  [0603-RES]  163.58,121.92 180 top
R200  10K  [0603-RES]  153.42,121.92 0 top
R201  390k  [0603-RES]  189.48,128.91 180 top
R202  10K  [0603-RES]  195.83,140.97 0 top
R203  10K  [0603-RES]  195.83,146.05 0 top
R204  10K  [0603-RES]  195.83,153.67 0 top
R205  10K  [0603-RES]  195.83,143.51 0 top
R206  10K  [0603-RES]  195.83,151.13 0 top
R207  10K  [0603-RES]  194.56,121.92 180 top
R208  10K  [0603-RES]  184.4,121.92 0 top
R209  390k  [0603-RES]  220.47,128.91 180 top
R210  10K  [0603-RES]  226.82,140.97 0 top
R211  10K  [0603-RES]  226.82,146.05 0 top
R212  10K  [0603-RES]  226.82,153.67 0 top
R213  10K  [0603-RES]  226.82,143.51 0 top
R214  10K  [0603-RES]  226.82,151.13 0 top
R215  10K  [0603-RES]  225.55,121.92 180 top
R216  10K  [0603-RES]  215.39,121.92 0 top
R217  390k  [0603-RES]  251.46,128.91 180 top
R218  10K  [0603-RES]  257.81,140.97 0 top
R219  10K  [0603-RES]  257.81,146.05 0 top
R220  10K  [0603-RES]  257.81,153.67 0 top
R221  10K  [0603-RES]  257.81,143.51 0 top
R222  10K  [0603-RES]  257.81,151.13 0 top
R223  10K  [0603-RES]  256.54,121.92 180 top
R224  10K  [0603-RES]  246.38,121.92 0 top
R225  390k  [0603-RES]  158.5,173.86 180 top
R226  10K  [0603-RES]  164.85,185.93 0 top
R227  10K  [0603-RES]  164.85,191.01 0 top
R228  10K  [0603-RES]  164.85,198.63 0 top
R229  10K  [0603-RES]  164.85,188.47 0 top
R230  10K  [0603-RES]  164.85,196.09 0 top
R231  10K  [0603-RES]  163.58,166.88 180 top
R232  10K  [0603-RES]  153.42,166.88 0 top
R233  390k  [0603-RES]  189.48,173.86 180 top
R234  10K  [0603-RES]  195.83,185.93 0 top
R235  10K  [0603-RES]  195.83,191.01 0 top
R236  10K  [0603-RES]  195.83,198.63 0 top
R237  10K  [0603-RES]  195.83,188.47 0 top
R238  10K  [0603-RES]  195.83,196.09 0 top
R239  10K  [0603-RES]  194.56,166.88 180 top
R240  10K  [0603-RES]  184.4,166.88 0 top
R241  390k  [0603-RES]  220.47,173.86 180 top
R242  10K  [0603-RES]  226.82,185.93 0 top
R243  10K  [0603-RES]  226.82,191.01 0 top
R244  10K  [0603-RES]  226.82,198.63 0 top
R245  10K  [0603-RES]  226.82,188.47 0 top
R246  10K  [0603-RES]  226.82,196.09 0 top
R247  10K  [0603-RES]  225.55,166.88 180 top
R248  10K  [0603-RES]  215.39,166.88 0 top
R249  390k  [0603-RES]  251.46,173.86 180 top
R250  10K  [0603-RES]  257.81,185.93 0 top
R251  10K  [0603-RES]  257.81,191.01 0 top
R252  10K  [0603-RES]  257.81,198.63 0 top
R253  10K  [0603-RES]  257.81,188.47 0 top
R254  10K  [0603-RES]  257.81,196.09 0 top
R255  10K  [0603-RES]  256.54,166.88 180 top
R256  10K  [0603-RES]  246.38,166.88 0 top
S1  Button A  [TACTILE_SWITCH_TALL]  25.91,13.21 180 top
S2  Button B  [TACTILE_SWITCH_TALL]  14.48,13.21 180 top
S3  [JOYSTICK_MINI]  20.83,44.96 225 top
S4  Button A  [TACTILE_SWITCH_TALL]  56.9,13.21 180 top
S5  Button B  [TACTILE_SWITCH_TALL]  45.47,13.21 180 top
S6  [JOYSTICK_MINI]  51.82,44.96 225 top
S7  Button A  [TACTILE_SWITCH_TALL]  87.88,13.21 180 top
S8  Button B  [TACTILE_SWITCH_TALL]  76.45,13.21 180 top
S9  [JOYSTICK_MINI]  82.8,44.96 225 top
S10  Button A  [TACTILE_SWITCH_TALL]  118.87,13.21 180 top
S11  Button B  [TACTILE_SWITCH_TALL]  107.44,13.21 180 top
S12  [JOYSTICK_MINI]  113.79,44.96 225 top
S13  Button A  [TACTILE_SWITCH_TALL]  25.91,58.17 180 top
S14  Button B  [TACTILE_SWITCH_TALL]  14.48,58.17 180 top
S15  [JOYSTICK_MINI]  20.83,89.92 225 top
S16  Button A  [TACTILE_SWITCH_TALL]  56.9,58.17 180 top
S17  Button B  [TACTILE_SWITCH_TALL]  45.47,58.17 180 top
S18  [JOYSTICK_MINI]  51.82,89.92 225 top
S19  Button A  [TACTILE_SWITCH_TALL]  87.88,58.17 180 top
S20  Button B  [TACTILE_SWITCH_TALL]  76.45,58.17 180 top
S21  [JOYSTICK_MINI]  82.8,89.92 225 top
S22  Button A  [TACTILE_SWITCH_TALL]  118.87,58.17 180 top
S23  Button B  [TACTILE_SWITCH_TALL]  107.44,58.17 180 top
S24  [JOYSTICK_MINI]  113.79,89.92 225 top
S25  Button A  [TACTILE_SWITCH_TALL]  163.58,13.21 180 top
S26  Button B  [TACTILE_SWITCH_TALL]  152.15,13.21 180 top
S27  [JOYSTICK_MINI]  158.5,44.96 225 top
S28  Button A  [TACTILE_SWITCH_TALL]  194.56,13.21 180 top
S29  Button B  [TACTILE_SWITCH_TALL]  183.13,13.21 180 top
S30  [JOYSTICK_MINI]  189.48,44.96 225 top
S31  Button A  [TACTILE_SWITCH_TALL]  225.55,13.21 180 top
S32  Button B  [TACTILE_SWITCH_TALL]  214.12,13.21 180 top
S33  [JOYSTICK_MINI]  220.47,44.96 225 top
S34  Button A  [TACTILE_SWITCH_TALL]  256.54,13.21 180 top
S35  Button B  [TACTILE_SWITCH_TALL]  245.11,13.21 180 top
S36  [JOYSTICK_MINI]  251.46,44.96 225 top
S37  Button A  [TACTILE_SWITCH_TALL]  163.58,58.17 180 top
S38  Button B  [TACTILE_SWITCH_TALL]  152.15,58.17 180 top
S39  [JOYSTICK_MINI]  158.5,89.92 225 top
S40  Button A  [TACTILE_SWITCH_TALL]  194.56,58.17 180 top
S41  Button B  [TACTILE_SWITCH_TALL]  183.13,58.17 180 top
S42  [JOYSTICK_MINI]  189.48,89.92 225 top
S43  Button A  [TACTILE_SWITCH_TALL]  225.55,58.17 180 top
S44  Button B  [TACTILE_SWITCH_TALL]  214.12,58.17 180 top
S45  [JOYSTICK_MINI]  220.47,89.92 225 top
S46  Button A  [TACTILE_SWITCH_TALL]  256.54,58.17 180 top
S47  Button B  [TACTILE_SWITCH_TALL]  245.11,58.17 180 top
S48  [JOYSTICK_MINI]  251.46,89.92 225 top
S49  Button A  [TACTILE_SWITCH_TALL]  25.91,116.84 180 top
S50  Button B  [TACTILE_SWITCH_TALL]  14.48,116.84 180 top
S51  [JOYSTICK_MINI]  20.83,148.59 225 top
S52  Button A  [TACTILE_SWITCH_TALL]  56.9,116.84 180 top
S53  Button B  [TACTILE_SWITCH_TALL]  45.47,116.84 180 top
S54  [JOYSTICK_MINI]  51.82,148.59 225 top
S55  Button A  [TACTILE_SWITCH_TALL]  87.88,116.84 180 top
S56  Button B  [TACTILE_SWITCH_TALL]  76.45,116.84 180 top
S57  [JOYSTICK_MINI]  82.8,148.59 225 top
S58  Button A  [TACTILE_SWITCH_TALL]  118.87,116.84 180 top
S59  Button B  [TACTILE_SWITCH_TALL]  107.44,116.84 180 top
S60  [JOYSTICK_MINI]  113.79,148.59 225 top
S61  Button A  [TACTILE_SWITCH_TALL]  25.91,161.8 180 top
S62  Button B  [TACTILE_SWITCH_TALL]  14.48,161.8 180 top
S63  [JOYSTICK_MINI]  20.83,193.55 225 top
S64  Button A  [TACTILE_SWITCH_TALL]  56.9,161.8 180 top
S65  Button B  [TACTILE_SWITCH_TALL]  45.47,161.8 180 top
S66  [JOYSTICK_MINI]  51.82,193.55 225 top
S67  Button A  [TACTILE_SWITCH_TALL]  87.88,161.8 180 top
S68  Button B  [TACTILE_SWITCH_TALL]  76.45,161.8 180 top
S69  [JOYSTICK_MINI]  82.8,193.55 225 top
S70  Button A  [TACTILE_SWITCH_TALL]  118.87,161.8 180 top
S71  Button B  [TACTILE_SWITCH_TALL]  107.44,161.8 180 top
S72  [JOYSTICK_MINI]  113.79,193.55 225 top
S73  Button A  [TACTILE_SWITCH_TALL]  163.58,116.84 180 top
S74  Button B  [TACTILE_SWITCH_TALL]  152.15,116.84 180 top
S75  [JOYSTICK_MINI]  158.5,148.59 225 top
S76  Button A  [TACTILE_SWITCH_TALL]  194.56,116.84 180 top
S77  Button B  [TACTILE_SWITCH_TALL]  183.13,116.84 180 top
S78  [JOYSTICK_MINI]  189.48,148.59 225 top
S79  Button A  [TACTILE_SWITCH_TALL]  225.55,116.84 180 top
S80  Button B  [TACTILE_SWITCH_TALL]  214.12,116.84 180 top
S81  [JOYSTICK_MINI]  220.47,148.59 225 top
S82  Button A  [TACTILE_SWITCH_TALL]  256.54,116.84 180 top
S83  Button B  [TACTILE_SWITCH_TALL]  245.11,116.84 180 top
S84  [JOYSTICK_MINI]  251.46,148.59 225 top
S85  Button A  [TACTILE_SWITCH_TALL]  163.58,161.8 180 top
S86  Button B  [TACTILE_SWITCH_TALL]  152.15,161.8 180 top
S87  [JOYSTICK_MINI]  158.5,193.55 225 top
S88  Button A  [TACTILE_SWITCH_TALL]  194.56,161.8 180 top
S89  Button B  [TACTILE_SWITCH_TALL]  183.13,161.8 180 top
S90  [JOYSTICK_MINI]  189.48,193.55 225 top
S91  Button A  [TACTILE_SWITCH_TALL]  225.55,161.8 180 top
S92  Button B  [TACTILE_SWITCH_TALL]  214.12,161.8 180 top
S93  [JOYSTICK_MINI]  220.47,193.55 225 top
S94  Button A  [TACTILE_SWITCH_TALL]  256.54,161.8 180 top
S95  Button B  [TACTILE_SWITCH_TALL]  245.11,161.8 180 top
S96  [JOYSTICK_MINI]  251.46,193.55 225 top
SJ1  [PAD-JUMPER-2-NC_BY_TRACE_YES_SILK]  22.1,17.02 180 bottom
SJ2  CS_SEL  [PAD-JUMPER-3-2OF3_NC_BY_TRACE_YES_SILK_FULL_BOX]  24.64,31.62 90 bottom
SJ3  [PAD-JUMPER-2-NC_BY_TRACE_YES_SILK]  24.64,44.96 180 bottom
SJ4  [PAD-JUMPER-2-NC_BY_TRACE_YES_SILK]  24.64,39.88 180 bottom
SJ5  [PAD-JUMPER-2-NC_BY_TRACE_YES_SILK]  24.64,50.04 180 bottom
SJ6  [PAD-JUMPER-2-NC_BY_TRACE_YES_SILK]  24.64,42.42 180 bottom
SJ7  [PAD-JUMPER-2-NC_BY_TRACE_YES_SILK]  24.64,47.5 180 bottom
SJ8  [PAD-JUMPER-2-NC_BY_TRACE_YES_SILK]  22.1,14.48 180 bottom
SJ9  CS_SEL  [PAD-JUMPER-3-2OF3_NC_BY_TRACE_YES_SILK_FULL_BOX]  55.63,31.62 90 bottom
SJ10  [PAD-JUMPER-2-NC_BY_TRACE_YES_SILK]  53.09,17.02 180 bottom
SJ11  [PAD-JUMPER-2-NC_BY_TRACE_YES_SILK]  55.63,44.96 180 bottom
SJ12  [PAD-JUMPER-2-NC_BY_TRACE_YES_SILK]  55.63,39.88 180 bottom
SJ13  [PAD-JUMPER-2-NC_BY_TRACE_YES_SILK]  55.63,50.04 180 bottom
SJ14  [PAD-JUMPER-2-NC_BY_TRACE_YES_SILK]  55.63,42.42 180 bottom
SJ15  [PAD-JUMPER-2-NC_BY_TRACE_YES_SILK]  55.63,47.5 180 bottom
SJ16  [PAD-JUMPER-2-NC_BY_TRACE_YES_SILK]  53.09,14.48 180 bottom
SJ17  CS_SEL  [PAD-JUMPER-3-2OF3_NC_BY_TRACE_YES_SILK_FULL_BOX]  86.61,31.62 90 bottom
SJ18  [PAD-JUMPER-2-NC_BY_TRACE_YES_SILK]  84.07,17.02 180 bottom
SJ19  [PAD-JUMPER-2-NC_BY_TRACE_YES_SILK]  86.61,44.96 180 bottom
SJ20  [PAD-JUMPER-2-NC_BY_TRACE_YES_SILK]  86.61,39.88 180 bottom
SJ21  [PAD-JUMPER-2-NC_BY_TRACE_YES_SILK]  86.61,50.04 180 bottom
SJ22  [PAD-JUMPER-2-NC_BY_TRACE_YES_SILK]  86.61,42.42 180 bottom
SJ23  [PAD-JUMPER-2-NC_BY_TRACE_YES_SILK]  86.61,47.5 180 bottom
SJ24  [PAD-JUMPER-2-NC_BY_TRACE_YES_SILK]  84.07,14.48 180 bottom
SJ25  CS_SEL  [PAD-JUMPER-3-2OF3_NC_BY_TRACE_YES_SILK_FULL_BOX]  117.6,31.62 90 bottom
SJ26  [PAD-JUMPER-2-NC_BY_TRACE_YES_SILK]  115.06,17.02 180 bottom
SJ27  [PAD-JUMPER-2-NC_BY_TRACE_YES_SILK]  117.6,44.96 180 bottom
SJ28  [PAD-JUMPER-2-NC_BY_TRACE_YES_SILK]  117.6,39.88 180 bottom